# Altium PCB Tray2.PcbDoc (part 6 of 6)
Units mil, origin at the board's own origin, x right, y up, seen from the top; angles counter-clockwise.
Board outline 6000 x 4000 mil, 2 copper layers (Top Layer, Bottom Layer); 418 components, 415 nets, 1799 pads, 870 vias.
Unrouted connection lines stored in the file: 363.
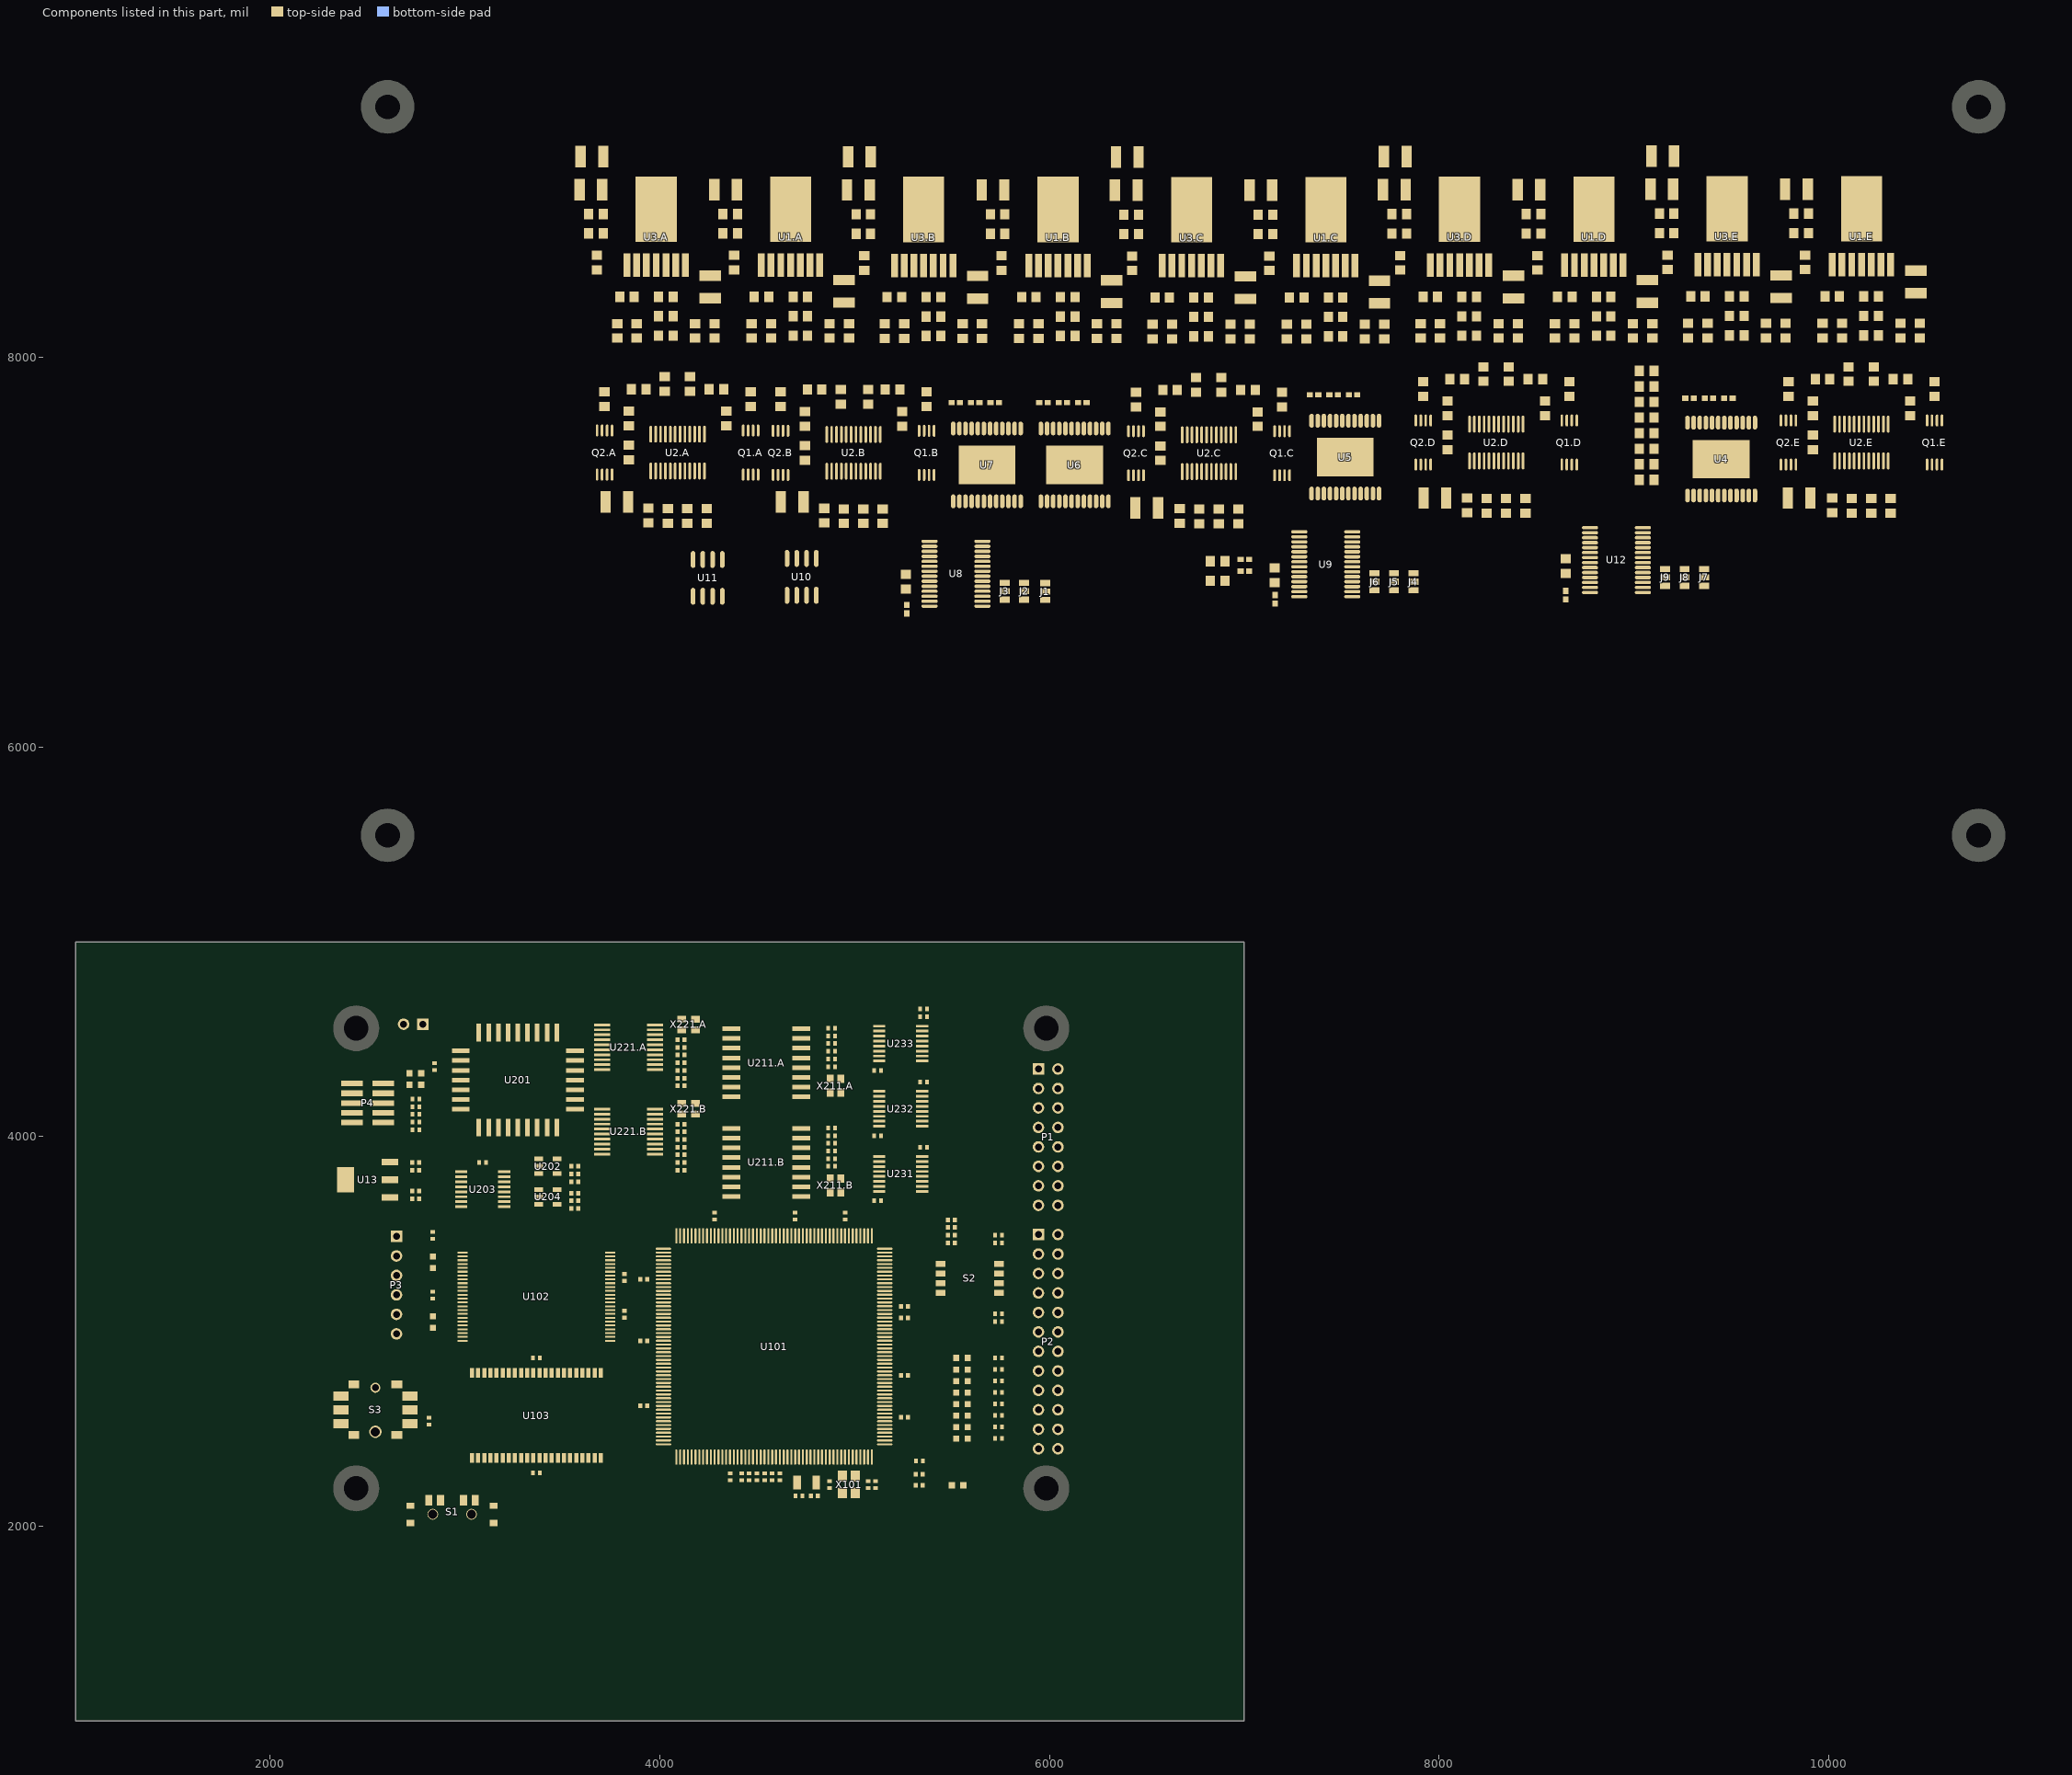
[diagram p6: the components of this part, seen from the top]

## Polygon pours and split planes (outlines as drawn) (continued)
no net on Top Layer "Top Solder-No Net" (solid, remove dead copper, pour order 31): 10299.76,8538.69 10299.76,8363.69 10324.76,8338.69 10324.76,8276.29 10324.76,8138.69 10524.76,8138.69 10564.69,8138.69 10564.69,8338.69 10374.76,8338.69 10349.76,8363.69 10349.76,8538.69
no net on Bottom Layer "Top Layer-No Net 1" (solid, remove dead copper, pour order 30): 2327.01,5271.69 11047.01,5271.69 11047.01,9551.69 2327.01,9551.69 2327.01,5271.69

## Other copper
Top Layer:
  rectangle: 3561.18,9106.69 10560.01,9158.69

## Silkscreen, mask and mechanical layers (free items; w line width, h text height)
Top Overlay:
  rectangle: 2244.17,3536.54 2737.28,3571.97
  lines w3.94: 5891.02,3547.17 6091.02,3547.17 ; 5891.02,3597.17 6091.02,3597.17
  lines w8: 3724.33,9228.07 3724.33,9503.66 7425.12,9503.66 7425.12,9228.07 3724.33,9228.07
  lines w10: 5844.17,2537.17 5894.17,2537.17 ; 5844.17,3037.17 5894.17,3037.17 ; 6094.17,2537.17 6144.17,2537.17 ; 6094.17,3037.17 6144.17,3037.17
  lines w15: 3527.48,6500.91 3527.48,6600.91 ; 3587.48,6530.91 3527.48,6550.91 ; 3587.48,6570.91 3527.48,6550.91 ; 6679.91,6550.91 3527.48,6550.91 ; 7461.67,6550.91 10614.09,6550.91 ; 10554.09,6530.91 10614.09,6550.91 ; 10554.09,6570.91 10614.09,6550.91 ; 10614.09,6500.91 10614.09,6600.91 ; 10642.83,6629.65 10742.83,6629.65 ; 10642.83,9149.33 10742.83,9149.33 ; 10672.83,6689.65 10692.83,6629.65 ; 10672.83,9089.33 10692.83,9149.33 ; 10692.83,7498.61 10692.83,6629.65 ; 10692.83,8280.37 10692.83,9149.33 ; 10712.83,6689.65 10692.83,6629.65 ; 10712.83,9089.33 10692.83,9149.33
  text "BLUEsat Power Subsystem" at 3783.39,9385.55 h60
  text "Cam Brown, Alexis Shaw, Mitch Wenke" at 5282.01,9287.69 h60
  text "V2 Prototype Board 2012" at 3783.39,9287.13 h60
  text "3V3A" at 3787.01,9051.69 h60
  text "3V3B" at 4477.01,9051.69 h60
  text "5V0A" at 5157.01,9051.69 h60
  text "5V0B" at 5847.01,9051.69 h60
  text "9V1A" at 6537.01,9051.69 h60
  text "9V1B" at 7227.01,9051.69 h60
  text "13V6A" at 7907.01,9051.69 h60
  text "13V6B" at 8607.01,9051.69 h60
  text "VVARA" at 9287.01,9051.69 h60
  text "VVARB" at 9977.01,9051.69 h60
  text "18-24V" at 2787.01,8381.69 h60
  text "CTRL" at 2837.01,7931.69 h60
  text "GND" at 2967.01,7831.69 h60
  text "SCL" at 2967.01,7731.69 h60
  text "SDA" at 2967.01,7631.69 h60
  text "3V3" at 2967.01,7531.69 h60
  text "2519.685 (mil)" at 10728.83,7508.61 h60 r90
  text "3V3_PWR" at 2837.01,7231.69 h60
  text "BUS" at 2967.01,7131.69 h60
  text "D2" at 6707.01,6931.69 h40
  text "EXT" at 2967.01,6911.69 h60
  text "1" at 9417.01,6901.69 h30
  text "1" at 7927.01,6871.69 h30
  text "D1" at 6707.01,6831.69 h40
  text "1" at 6037.01,6821.69 h30
  text "0" at 9417.01,6811.69 h30
  text "0" at 7927.01,6791.69 h30
  text "0" at 6037.01,6741.69 h30
  text "7086.614 (mil)" at 6689.91,6514.92 h60
  text "GND" at 2698.9,4399.72 h40 r90
  text "3V3" at 2803.23,4399.72 h40 r90
  text "TX1" at 5724.17,4317.17 h60
  text "TX2" at 5704.17,4217.17 h60
  text "RX1" at 5724.17,4117.17 h60
  text "RX2" at 5704.17,4017.17 h60
  text "G_TX1" at 5604.17,3917.17 h60
  text "G_TX2" at 5584.17,3817.17 h60
  text "G_RX1" at 5604.17,3717.17 h60
  text "G_RX2" at 5584.17,3617.17 h60
  text "1" at 5844.17,3477.17 h40
  text "1" at 2711.69,3472.56 h19.68
  text "0" at 5349.17,3377.17 h40
  text "1" at 5354.17,3297.17 h40
  text "2" at 5349.17,3217.17 h40
  text "3" at 5349.17,3137.17 h40
  text "11" at 5824.17,2977.17 h40
  text "FTDI - 5V VCC ONLY" at 2787.48,2890.87 h40 r90
  text "RST" at 2834.17,2717.17 h40 r90
  text "21" at 5814.17,2477.17 h40
  text "NC" at 2894.76,2219.61 h40
  text "ISP" at 3105.39,2218.62 h40
  text "RUN" at 2662.48,2217.64 h40
  text "PWR" at 5476.46,2122.17 h40
  text "BLUEsat CSC/Comms 2.1" at 3255.98,2043.43 h60
Top Paste:
  circle w62.99: c5984.33,4556.22 r31.5
  circle w62.99: c2441.02,4556.22 r31.5
  circle w62.99: c2441.02,2194.02 r31.5
  circle w62.99: c5984.33,2194.02 r31.5
  lines w7.87: 2244.17,2194.02 2244.17,1997.17 2441.02,1997.17 ; 2244.17,4556.22 2244.17,4753.07 2441.02,4753.07 ; 5984.33,1997.17 6181.18,1997.17 6181.18,2194.02 ; 5984.33,4753.07 6181.18,4753.07 6181.18,4556.22
Mechanical 1:
  lines w7.87: 2244.17,1997.17 2244.17,4753.07 6181.18,4753.07 6181.18,1997.17 2244.17,1997.17
Mechanical 9:
  lines w3.94: 2307.01,5251.69 2307.01,9582.4 11066.85,9582.4 11066.85,5251.69 2307.01,5251.69

## Text inside footprints (layer, text, board x,y; h text height)
P3: Top Overlay "5V0" at 2422.72,3162.32 h60; Top Overlay "CTS" at 2422.72,3062.32 h60; Top Overlay "GND" at 2422.72,2962.32 h60; Top Overlay "DTR" at 2422.72,3462.32 h60; Top Overlay "RXI" at 2422.72,3362.32 h60; Top Overlay "TXO" at 2422.72,3262.32 h60